# Altium PCB LKAS-EPS_PCB_V2I5.PcbDoc (part 1 of 2)
Units mm, origin at the board's own origin, x right, y up, seen from the top; angles counter-clockwise.
Board outline 49.4 x 33.91 mm, 4 copper layers (Top Layer, Layer 1, Layer 2, Bottom Layer), stack 0.602 mm thick; 54 components, 68 nets, 241 pads, 110 vias.
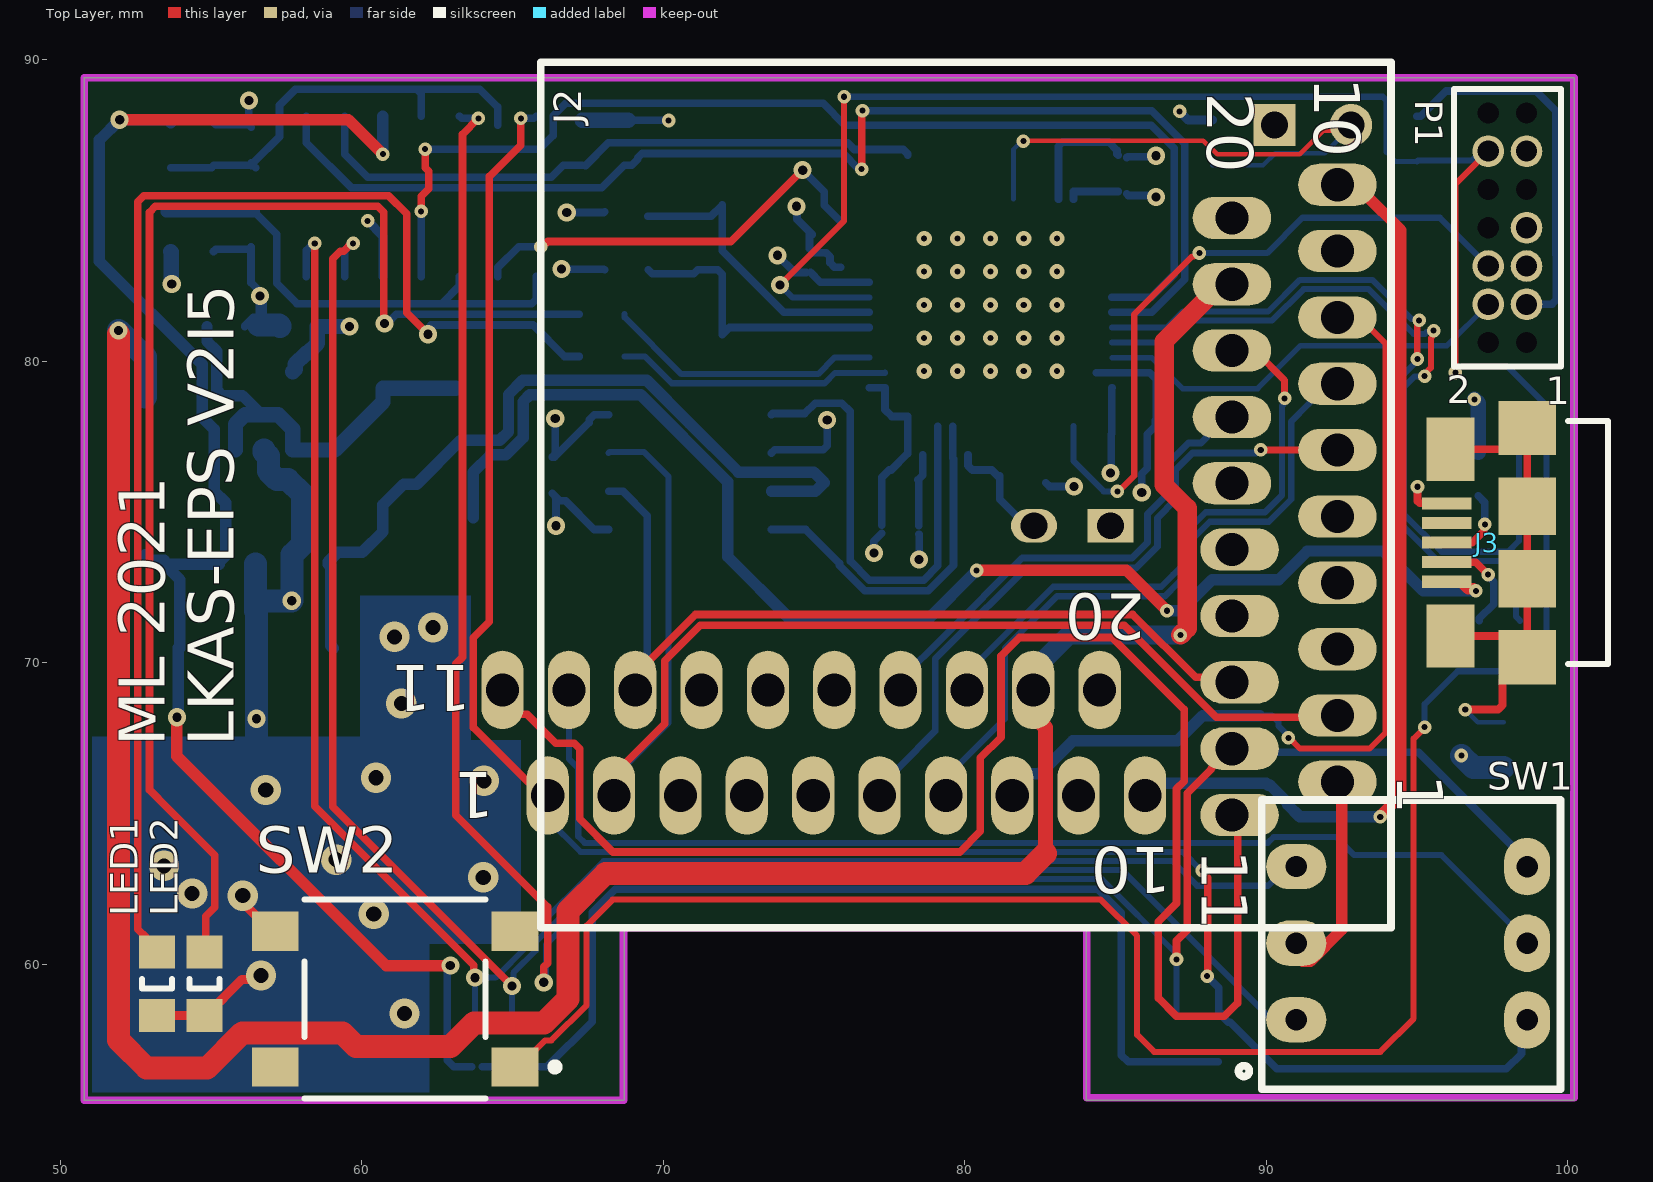
[diagram p0: Top Layer view]
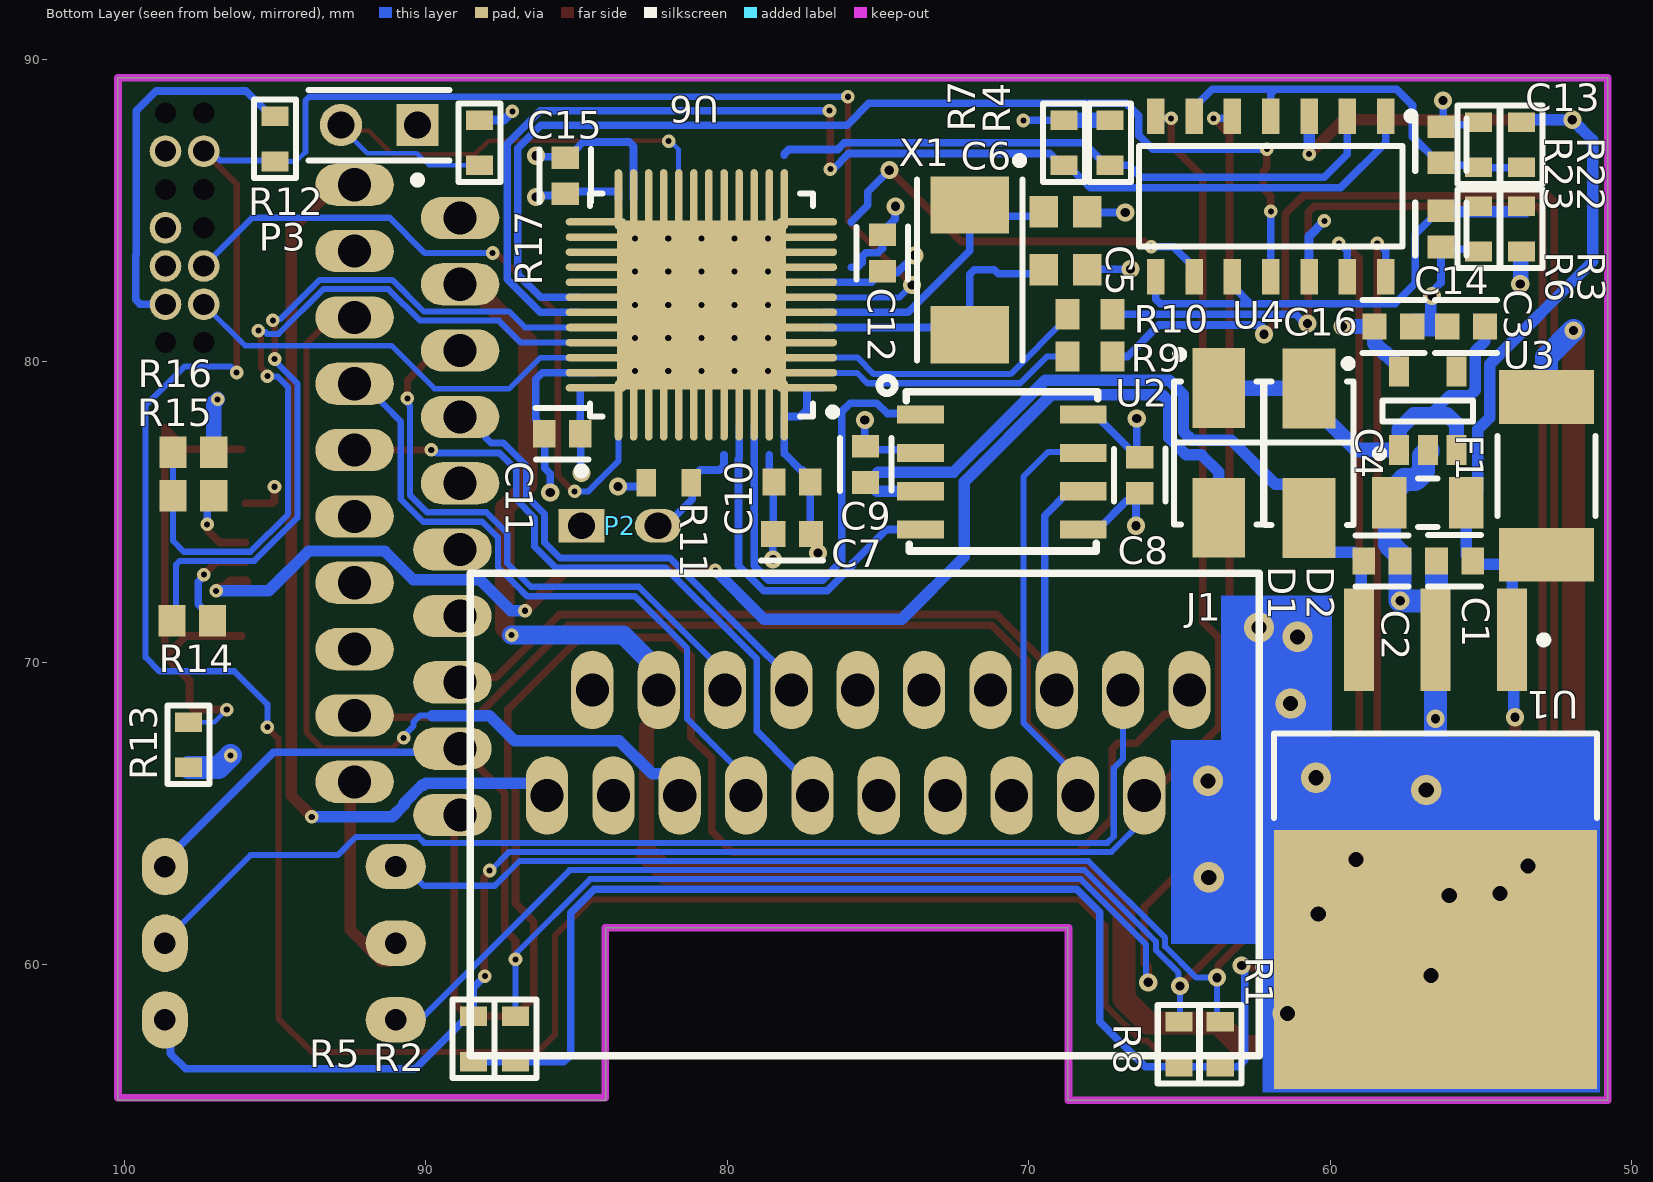
[diagram p1: Bottom Layer view, seen from below]
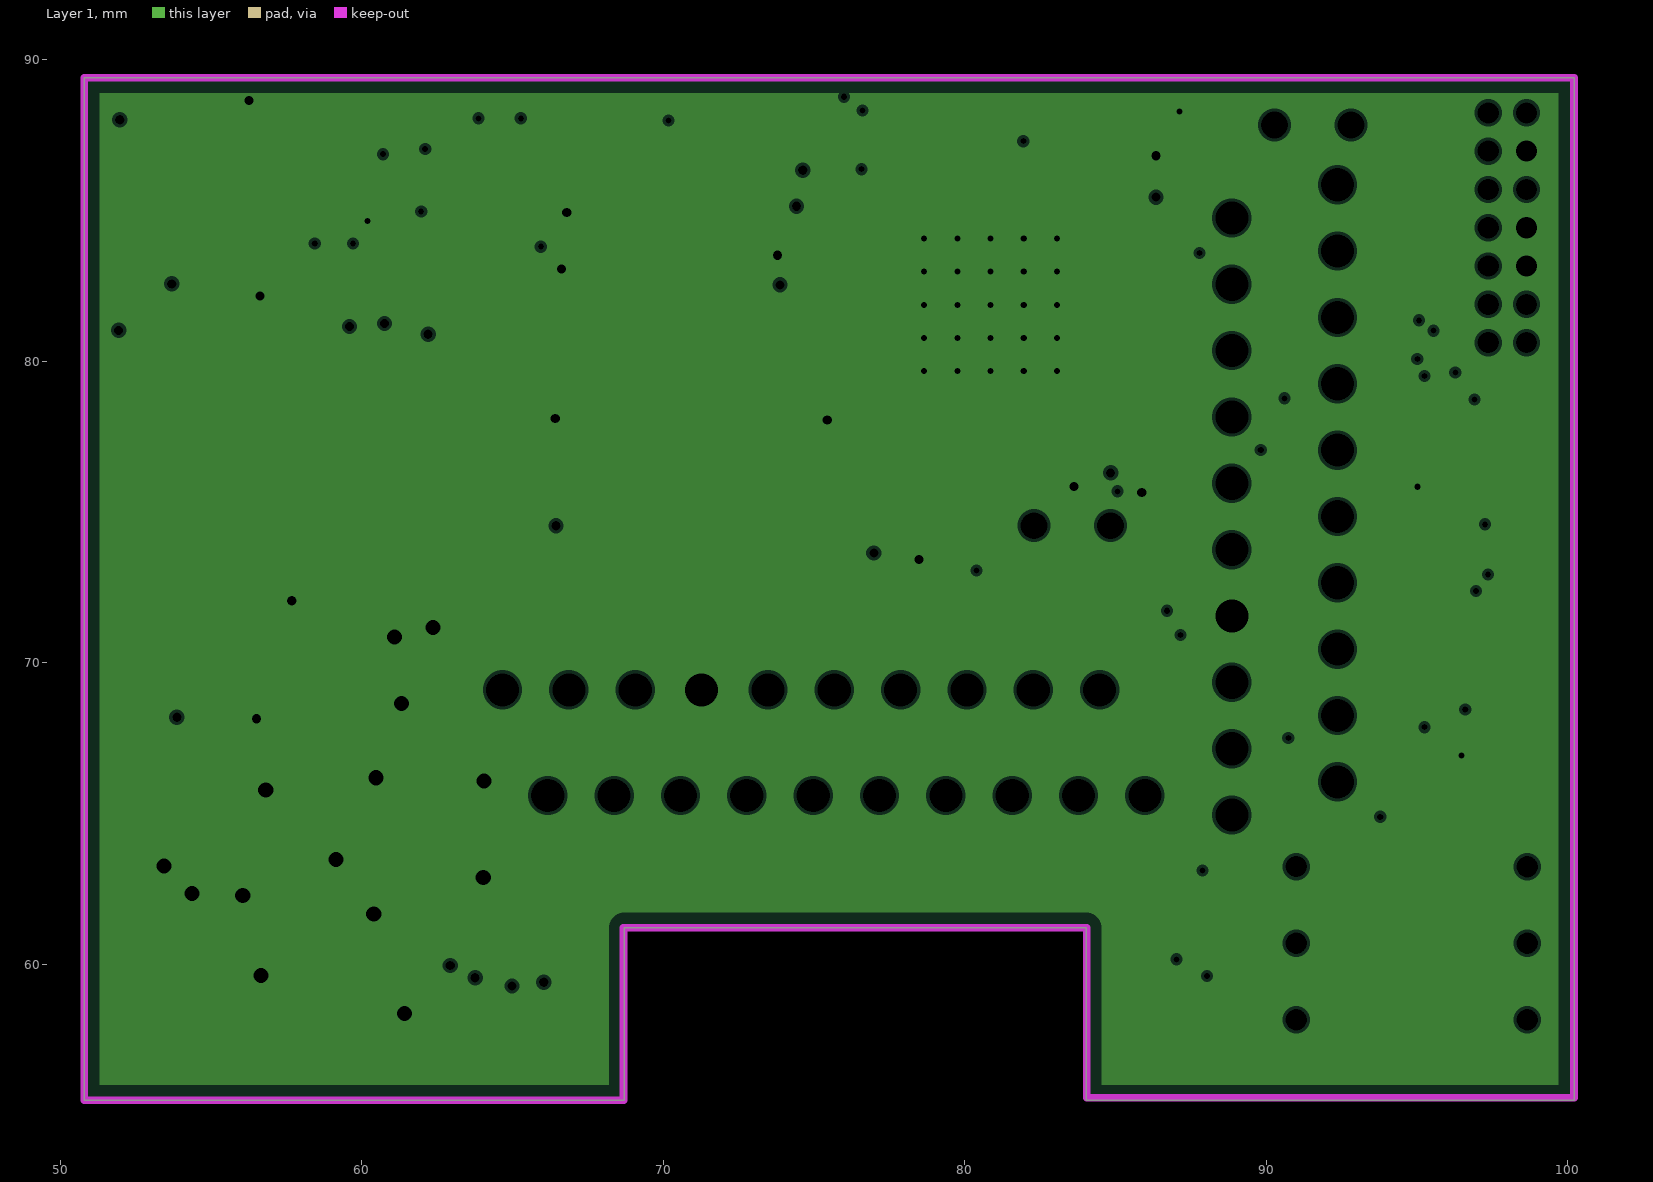
[diagram p2: Layer 1, clearances drawn from the general rule]
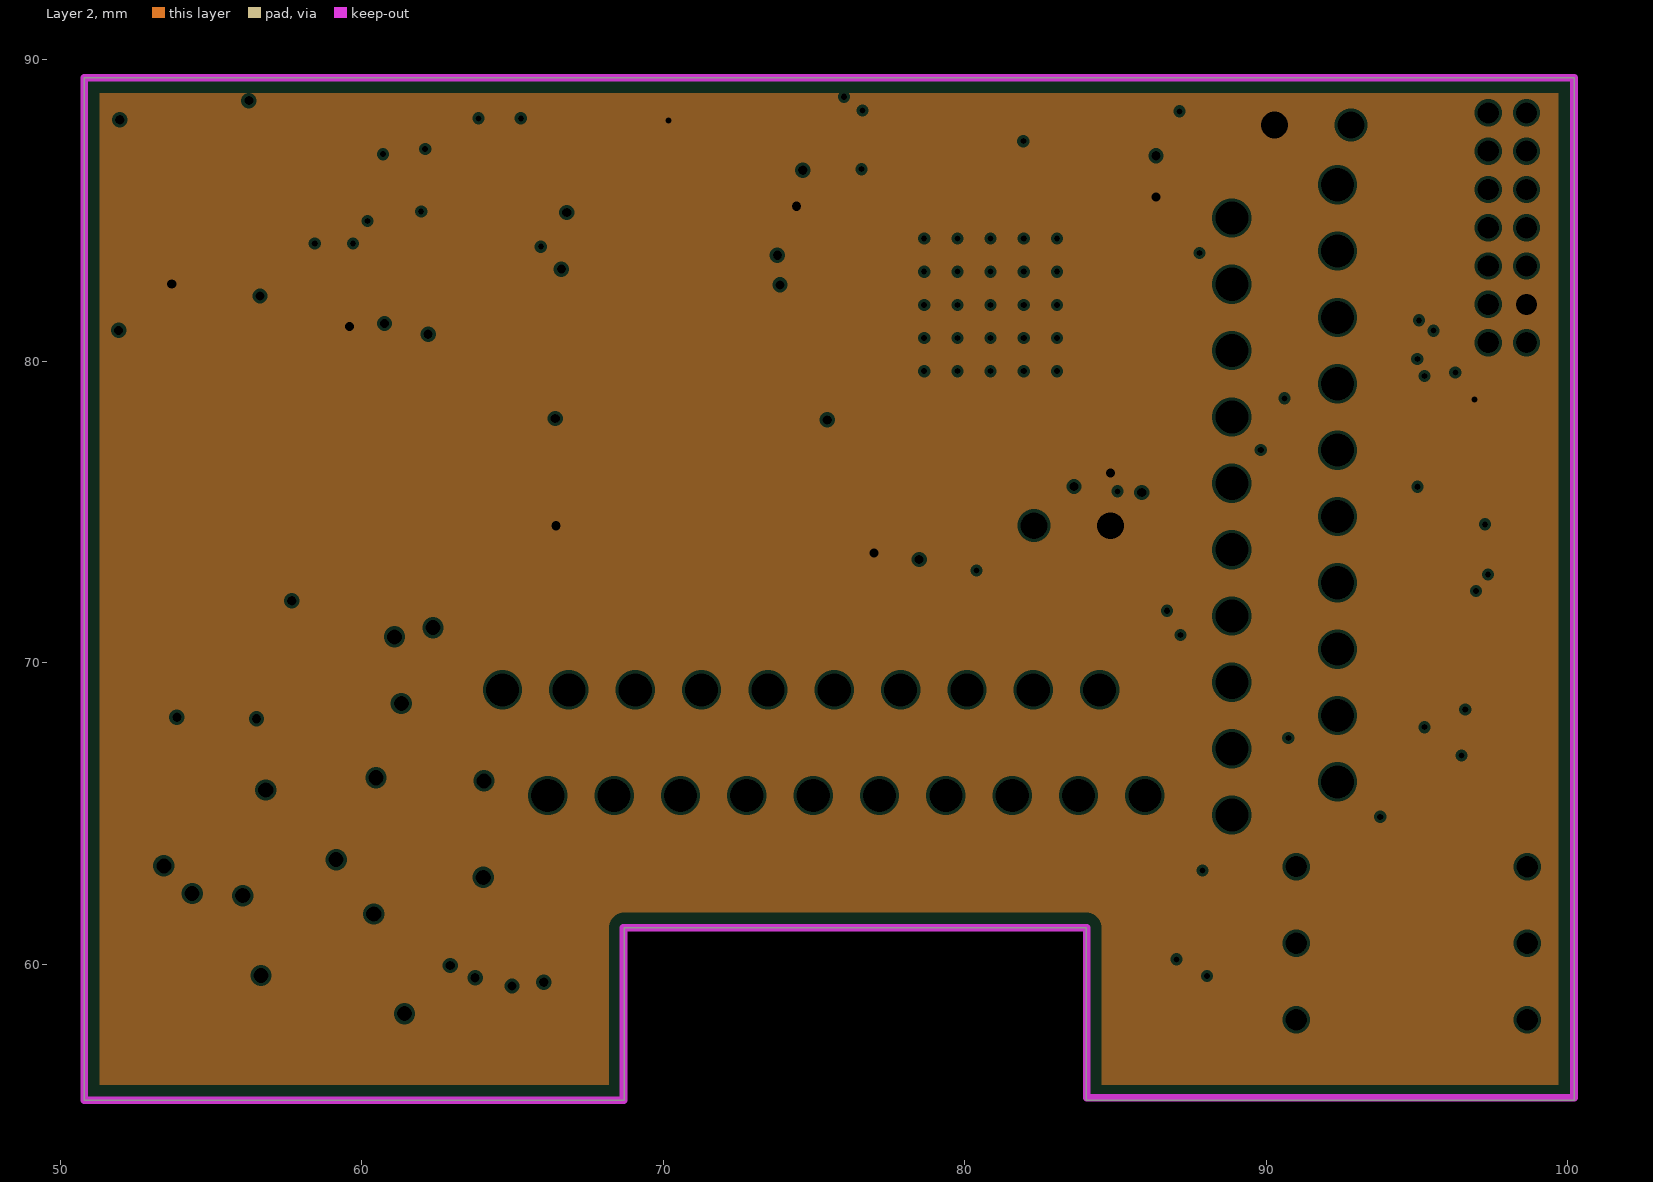
[diagram p3: Layer 2, clearances drawn from the general rule]
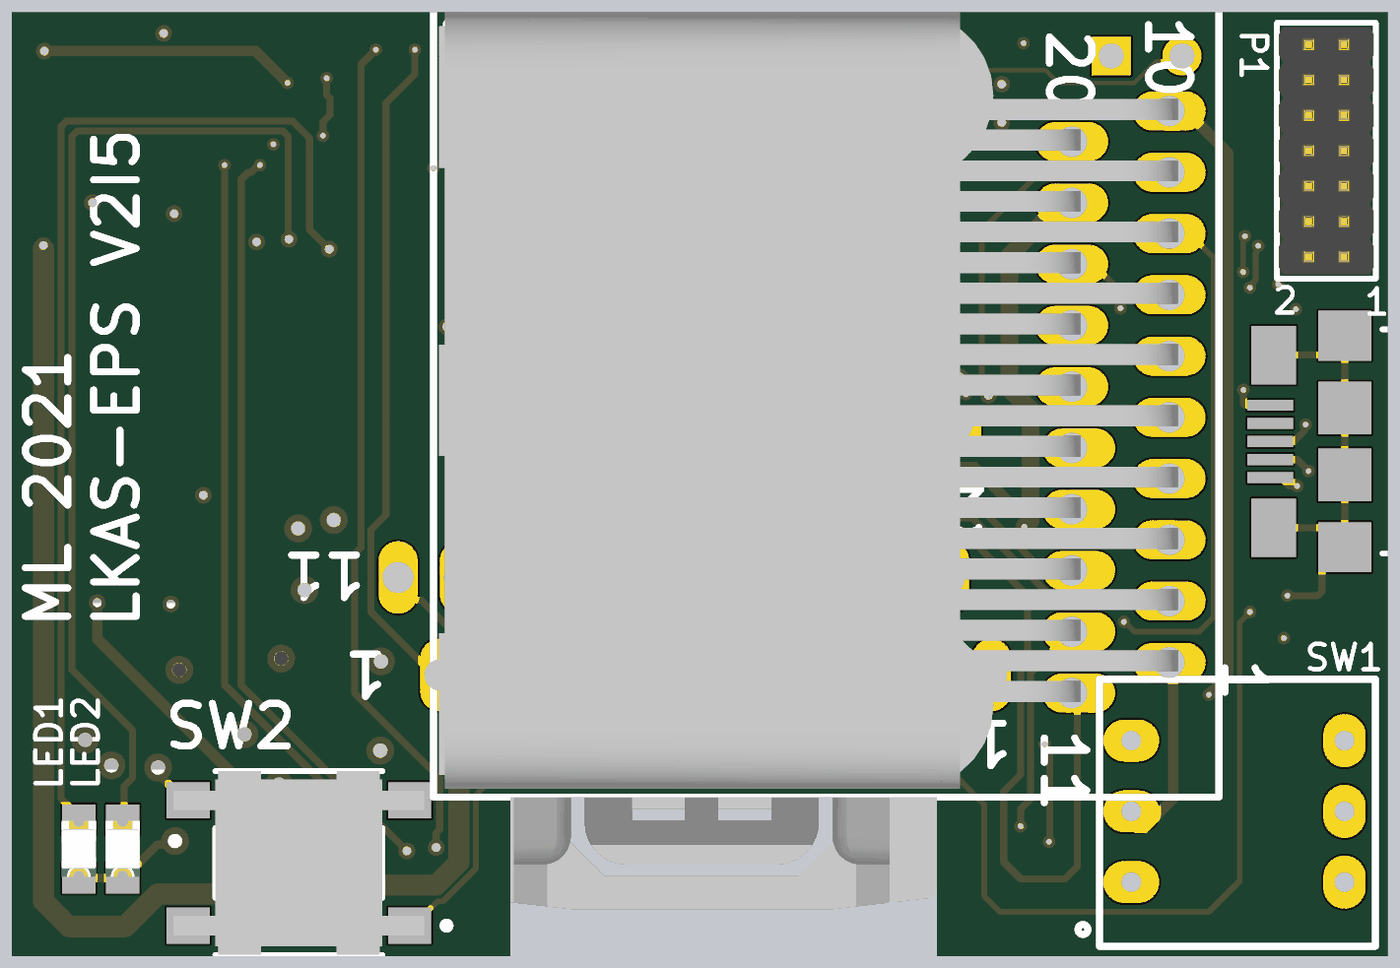
[diagram p4: 3D render of the assembled board from above, using the file's embedded part models]
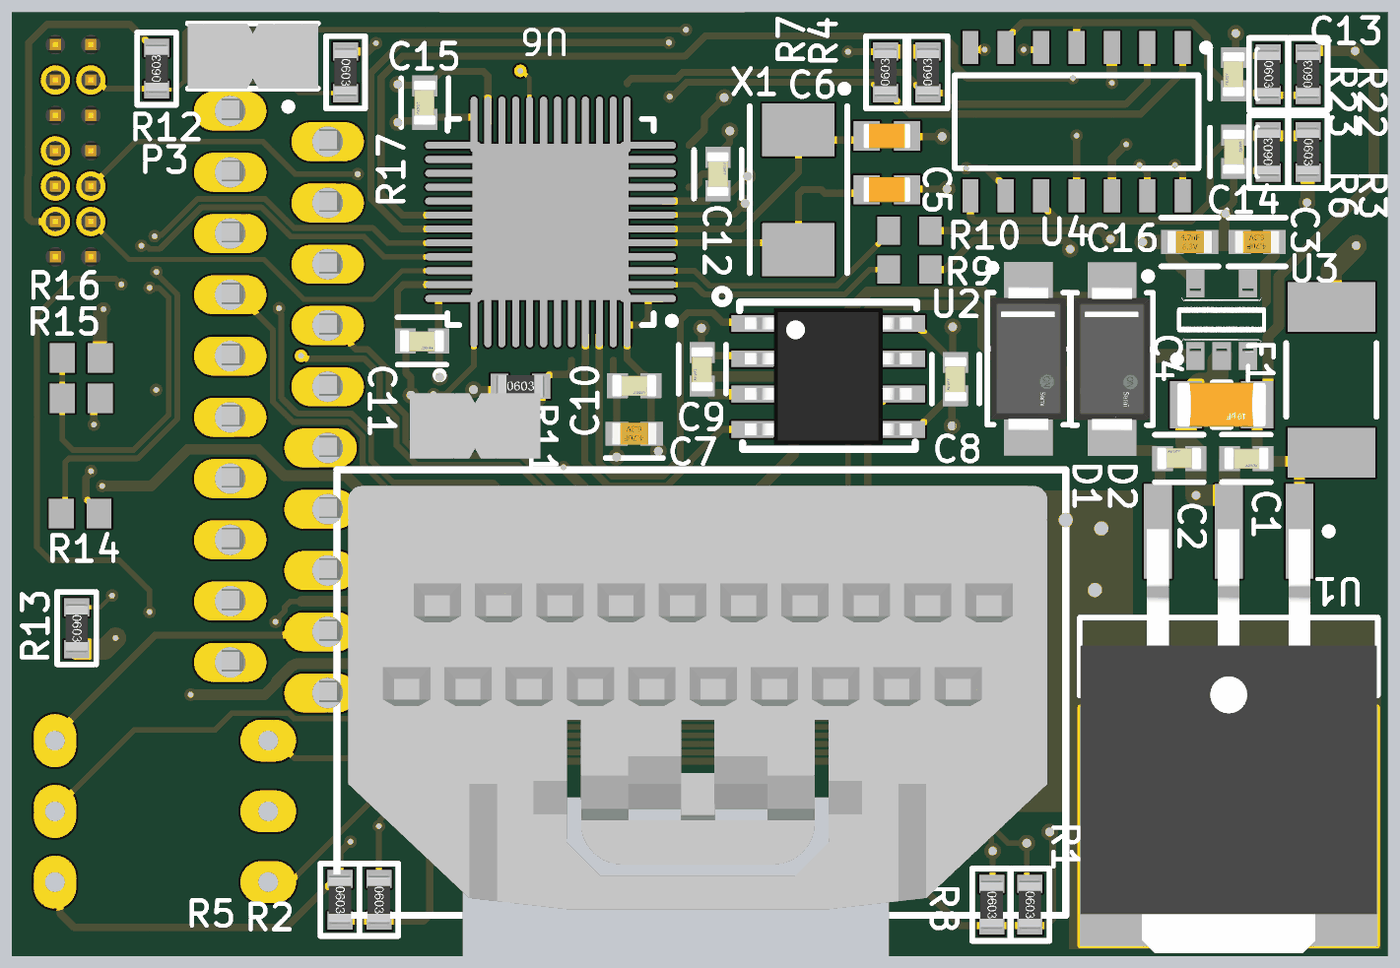
[diagram p5: 3D render of the assembled board from below, using the file's embedded part models]

## Layer stack, top to bottom
Top Solder: solder mask 0.0102, Solder Resist, Dk 3.5
Top Layer: signal copper 0.035
Dielectric 1: prepreg 0.0711, PP-006, Dk 4.1
Layer 1: plane copper 0.035, net GND
Dielectric1: dielectric 0.32, FR-4, Dk 4.8
Layer 2: plane copper 0.035, net +3V3
Dielectric 2: prepreg 0.0711, PP-006, Dk 4.1
Bottom Layer: signal copper 0.035
Bottom Solder: solder mask 0.0102, Solder Resist, Dk 3.5

## Board outline
50.8,55.499 68.707,55.499 68.707,61.214 84.023,61.214 84.023,55.499 100.203,55.499 100.203,89.408 50.8,89.408

## Design rules (kind name [scope] priority, off if disabled: settings)
BoardOutlineClearance [All] p1: gap=0.2 ignorepadtopadclearanceinfootprint=FALSE
Clearance [All] p1: gap=0.102 ignorepadtopadclearanceinfootprint=FALSE except(0.127: Arc-Via Track-Via SMDPad-Via THPad-Via Via-Via Via-Fill Via-Poly Via-Region Via-Text; 0.25: Arc-Hole Track-Hole SMDPad-Hole THPad-Hole Via-Hole Fill-Hole Poly-Hole Region-Hole Text-Hole)
ComponentClearance [All] p1: gap=0.102 collisioncheckmode=3 verticalgap=0.102 showdistances=TRUE
DiffPairsRouting [All] p1: maxlimit=0.102 minlimit=0.102 mostfreqgap=0.102 toplayer_minwidth=0.102 toplayer_maxwidth=1816.048 toplayer_prefwidth=0.102 bottomlayer_minwidth=0.102 bottomlayer_maxwidth=1816.048 bottomlayer_prefwidth=0.102 maxuncoupledlength=12.7
Height [All] p1: minheight=0 maxheight=1816.048 prefheight=12.7
HoleSize [All] p1: absolutevalues=TRUE maxlimit=6.3 minlimit=0.2 maxpercent=80.000 minpercent=20.000
HoleToHoleClearance [All] p1: gap=0.25 allowstackedmicrovias=FALSE
MatchedLengths "Schematic Matched Net Lengths" [InNet('USB_N')] p1: tolerance=3.81 checknetsindiffpair=FALSE checkdiffpairvsdiffpair=TRUE checkxsignals=TRUE checkothers=TRUE
MinimumAnnularRing [All] p1: minimumring=0.076
MinimumSolderMaskSliver [All] p1: minsoldermaskwidth=0
PlaneClearance [All] p1: clearance=0.102
PlaneConnect PlaneConnectPowerPads [InPadClass('PowerPads')] p1: planeconnectstyle=Direct reliefexpansion=0.508 reliefentries=4 reliefconductorwidth=0.254 reliefairgap=0.254
PlaneConnect [All] p2: pad.planeconnectstyle=Relief pad.reliefexpansion=0.3 pad.reliefentries=4 pad.reliefconductorwidth=0.102 pad.reliefairgap=0.102 via.planeconnectstyle=Direct via.reliefexpansion=0.3 via.reliefentries=4 via.reliefconductorwidth=0.127 via.reliefairgap=0.127
PolygonConnect PolygonConnectPowerPads [All vs (InPadClass('PowerPads'))] p1: connectstyle=Direct reliefconductorwidth=0.254 reliefentries=4 polygonreliefangle="90 Angle" airgapwidth=0.254
PolygonConnect [All] p2: thpad.connectstyle=Relief thpad.reliefconductorwidth=0.102 thpad.reliefentries=4 thpad.polygonreliefangle="90 Angle" thpad.airgapwidth=0.102 smdpad.connectstyle=Relief smdpad.reliefconductorwidth=0.102 smdpad.reliefentries=4 smdpad.polygonreliefangle="90 Angle" smdpad.airgapwidth=0.102 via.connectstyle=Direct via.reliefconductorwidth=0.127 via.reliefentries=4 via.polygonreliefangle="90 Angle" via.airgapwidth=0.127
RoutingVias [All] p1: holewidth=0.2 width=0.45 viastyle="Through Hole" minholewidth=0.2 minwidth=0.45 maxholewidth=6.3 maxwidth=6.55
SilkToSilkClearance [All] p1: silktosilkclearance=0
SilkToSolderMaskClearance [IsPad] p1: minsilkscreentomaskgap=0.102 clearancetoexposedcopper=TRUE
SolderMaskExpansion [All] p1: expansion=0.075 istentingtop=FALSE
UnRoutedNet [All] p1: checkbadconnections=TRUE
Width [All] p1: maxlimit=1816.048 minlimit=0.102 preferedwidth=0.152 minimp=50.000000 maximp=50.000000 favimp=50.000000
19 further rules are at their usual default settings.

## Classes and differential pairs
differential pair USB_R: +USB_R_P -USB_R_N
differential pair USB: +USB_P -USB_N

## Components (designator, comment, footprint, x,y, rotation, side; value= is the part's Value field where it differs from the comment)
C1 "C0603C104M3RACTU" FP-C0603C-CF-MFG 55.88,73.381 r0 bottom value="0.10 μF"
C2 "C0603C104M3RACTU" FP-C0603C-CF-MFG 58.293,73.381 r180 bottom value="0.10 μF"
C3 "CL10B475KQ8NQNC" FP-CL10-IPC_C 55.499,81.153 r0 bottom value=4.7uF
C4 "CL31A106KBHNNNE" FP-CL31-IPC_C 56.769,75.311 r0 bottom value=10uF
C5 "GRM1885C1H220JA01D" CAPC1608X90X35ML10T15 68.783,83.033 r180 bottom
C6 "GRM1885C1H220JA01D" CAPC1608X90X35ML10T15 68.783,84.963 r180 bottom
C7 "CL10B475KQ8NQNC" FP-CL10-IPC_C 77.851,74.27 r0 bottom value=4.7uF
C8 "C0603C104M3RACTU" FP-C0603C-CF-MFG 66.319,76.225 r90 bottom value="0.10 μF"
C9 "C0603C104M3RACTU" FP-C0603C-CF-MFG 75.413,76.581 r90 bottom value="0.10 μF"
C10 "C0603C104M3RACTU" FP-C0603C-CF-MFG 77.851,75.997 r0 bottom value="0.10 μF"
C11 "C0603C104M3RACTU" FP-C0603C-CF-MFG 85.471,77.597 r0 bottom value="0.10 μF"
C12 "C0603C104M3RACTU" FP-C0603C-CF-MFG 74.854,83.591 r270 bottom value="0.10 μF"
C13 "C0603C104M3RACTU" FP-C0603C-CF-MFG 56.336,87.18 r90 bottom value="0.10 μF"
C14 "C0603C104M3RACTU" FP-C0603C-CF-MFG 56.333,84.392 r270 bottom value="0.10 μF"
C15 "C0603C104M3RACTU" FP-C0603C-CF-MFG 85.369,86.157 r90 bottom value="0.10 μF"
C16 "CL10B475KQ8NQNC" FP-CL10-IPC_C 57.912,81.153 r180 bottom value=4.7uF
D1 "SS14" FP-403AE-MFG 63.703,76.962 r90 bottom
D2 "SS14" FP-403AE-MFG 60.706,76.953 r90 bottom
F1 "1812L050/30PR" LFUS-1812L05030PR_V 52.832,76.2 r270 bottom
J1 "MX34020SF1" MX34020SF1 85.731,70.939 r180 bottom locked
J2 "MX34020NF1" MX34020NF1 92.358,85.856 r270 top locked
J3 "10118192-0001LF" FCI-10118192-0001LF-5_V 98.654,73.99 r90 top
LED1 "150080SS75000" 0805_A 53.213,59.36 r90 top
LED2 "150080BS75000" 0805_A 54.788,59.36 r90 top
P1 "62201421121" 62201421121 97.993,84.43 r90 top
P2 "5-146280-2" TECO-5-146280-2_V#1 83.566,74.549 r180 bottom
P3 "5-146280-2" TECO-5-146280-2_V#2 91.542,87.833 r0 bottom
R1 "4K7" R0603 63.652,57.353 r270 bottom
R2 "4K7" R0603 87.02,57.531 r270 bottom
R3 "4K7" R0603 53.667,84.392 r270 bottom
R4 "4K7" R0603 67.31,87.249 r90 bottom
R5 "4K7" R0603 88.417,57.531 r270 bottom
R6 "4K7" R0603 55.089,84.392 r90 bottom
R7 "4K7" R0603 68.834,87.249 r90 bottom
R8 "4K7" R0603 65.024,57.353 r270 bottom
R9 "RC0603FR-07560RL" RESC1608X55X25ML10T15 67.97,80.162 r180 bottom
R10 "RC0603FR-07560RL" RESC1608X55X25ML10T15 67.97,81.559 r180 bottom
R11 "4K7" R0603 81.94,75.971 r180 bottom
R12 "4K7" R0603 94.996,87.376 r90 bottom
R13 "4K7" R0603 97.866,67.285 r270 bottom
R14 "CRCW060322R0JNTA" RESC1609X50X30ML10T20 97.739,71.399 r180 bottom value=22R
R15 "CRCW060322R0JNTA" RESC1609X50X30ML10T20 97.703,75.54 r180 bottom value=22R
R16 "CRCW06031K50FKTA" RESC1609X50X30ML10T20 97.703,76.987 r180 bottom
R17 "4K7" R0603 88.214,87.249 r270 bottom
R22 "4K7" R0603 53.667,87.18 r90 bottom
R23 "4K7" R0603 55.089,87.18 r270 bottom
SW1 "76STC02T" 76STC02T 94.818,60.706 r90 top
SW2 "B3S-1000" OMRON-B3S-1000-4_V 61.112,58.852 r180 top
U1 "UA7805CKTTR" KTT0003A_V 56.515,64.164 r270 bottom
U2 "MCP2562FD-E/SN" MCP2561 70.891,76.327 r180 bottom
U3 "MIC5504-3.3YM5-TR" FP-SOT23-5LD-PL-1-MFG 56.769,78.359 r90 bottom
U4 "LM339DR2G" ONSC-SOIC-14-751A-03_V 61.976,85.471 r270 bottom
U6 "STM32F103C6U6A" STM-UFQFPN48_M 80.856,81.872 r0 bottom
X1 "ABM7-8.000MHZ-D2Y-T" ABRA-ABM7-2_V 71.958,83.033 r270 bottom

## Footprints (in the part's own frame and the unit in brackets; to place one, negate y for a bottom-side part, rotate by r counter-clockwise, add the part's x,y. Pads: shape width x height; smd on the part's side, far side on the other; paste and mask are expansions set on the pad)
76STC02T [mm] "Switch Rocker Arm"
  oval 1.5x2 hole 0.71: 1A(-2.538,3.827) 2A(2.542,3.827) C1(0.002,3.827)
  oval 1.905x1.524 hole 0.71: 1B(-2.542,-3.827) 2B(2.538,-3.827) C2(-0.002,-3.827)
  silkscreen extent -4.85,-4.93 4.75,5.74
0805_A [mm] "Chip LED, 2-Leads, Body 2.0x1.3mm, IPC Medium Density"
  rect 1.1x1.2 smd: 1(-1.05,0) 2(1.05,0)
  silkscreen extent -0.15,-0.5 0.15,0.5, body extent -1,-0.63 1,0.62, height 0.68
62201421121 [mm] "Pin Header, pitch 1.27 mm, THT, Vertical, dual row, 14p"
  round 0 hole 0.7 unplated: 1(-3.81,-0.635) 2(-3.81,0.635) 8(0,0.635) 9(1.27,-0.635) 10(1.27,0.635) 13(3.81,-0.635) 14(3.81,0.635)
  round 1.05 hole 0.7: 3(-2.54,-0.635) 4(-2.54,0.635) 5(-1.27,-0.635) 6(-1.27,0.635) 7(0,-0.635) 11(2.54,-0.635) 12(2.54,0.635)
  silkscreen extent -4.59,-1.78 4.59,1.78, body extent -4.44,-1.7 4.45,1.7, height 5.33
ABRA-ABM7-2_V [mm] "SMD, 2-Leads, Body 6x3.5mm"
  rect 1.9x2.6 smd: 1(-2.15,0) 2(2.15,0)
  silkscreen extent -3.75,-1.75 3,1.78, body extent -3,-1.75 3,1.75, height 1.4
CAPC1608X90X35ML10T15 [mm] "Chip Capacitor, 2-Leads, Body 1.7x0.9mm, IPC Low Density"
  rect 0.95x1.05 smd: 1(-0.725,0) 2(0.725,0)
  body extent -0.85,-0.45 0.85,0.45, height 0.9
FCI-10118192-0001LF-5_V [mm] "SMD, 5-Leads, Body 8.05x5.77mm, Pitch 0.65mm"
  rect 0.4x1.65 smd: 1(-1.3,2.675) 2(-0.65,2.675) 3(0,2.675) 4(0.65,2.675) 5(1.3,2.675)
  rect 2.1x1.6 smd: 6(-3.1,2.55) 7(3.1,2.55)
  rect 1.8x1.9 smd: 8(-3.8,0) 9(3.8,0)
  rect 1.9x1.9 smd: 10(-1.2,0) 11(1.2,0)
  silkscreen extent -4.03,-2.67 4.03,-1.35, body extent -4.03,-2.67 4.03,3.1, height 2.7
FP-403AE-MFG [mm]
  rect 2.65x1.75 smd paste+0 mask+0: 1(-2.15,0) 2(2.15,0)
  silkscreen extent -2.37,-1.48 3.39,1.48, body extent -2.6,-1.36 2.6,1.36, height 2.5
FP-C0603C-CF-MFG [mm]
  rect 0.75x0.9 smd paste+0 mask+0: 1(-0.6,0) 2(0.6,0)
  silkscreen extent -0.87,-0.85 0.88,0.85, body extent -0.8,-0.4 0.8,0.4, height 0.87
FP-CL10-IPC_C [mm]
  rect 0.806x0.858 smd paste+0 mask+0: 1(-0.626,0) 2(0.626,0)
  silkscreen extent -1.03,-0.87 1.03,0.87, body extent -0.8,-0.4 0.8,0.4, height 0.95
FP-CL31-IPC_C [mm]
  rect 1.154x1.706 smd: 1(-1.276,0) 2(1.276,0)
  silkscreen extent -0.32,-0.8 0.32,0.8, body extent -1.6,-0.8 1.6,0.8, height 1.8
FP-SOT23-5LD-PL-1-MFG [mm]
  rect 1x0.66 smd paste+0 mask+0: 1(-1.3,0.95) 2(-1.3,0) 3(-1.3,-0.95) 4(1.3,-0.95) 5(1.3,0.95)
  silkscreen extent -1.54,-1.5 0.35,1.73, body extent -1.4,-1.45 1.4,1.45, height 1.45
KTT0003A_V [mm] "DPAK, 3-Leads, Body 10.65x9.65mm, Pitch 2.54mm"
  rect 3.4x1 smd: 1(-6.6,2.54) 2(-6.6,0) 3(-6.6,-2.54)
  rect 8.6x10.7 smd: 4(4,0)
  silkscreen extent -6.72,-5.35 -0.7,5.35, body extent -6.68,-5.32 8.56,5.32, height 4.83
LFUS-1812L05030PR_V [mm] "SMD, 2-Leads, Body 4.55x3.24mm"
  rect 1.78x3.15 smd: 1(-2.615,0) 2(2.615,0)
  silkscreen extent -1.33,-1.62 1.33,1.62, body extent -2.27,-1.62 2.27,1.62, height 1
MCP2561 [mm] "SOIC 8 SN type"
  rect 1.55x0.6 smd: 1(-2.7,1.905) 2(-2.7,0.635) 3(-2.7,-0.635) 4(-2.7,-1.905) 5(2.7,-1.905) 6(2.7,-0.635) 7(2.7,0.635) 8(2.7,1.905)
  silkscreen extent -4.06,-2.62 3.18,3.12, body extent -3,-2.45 3,2.45, height 1.75
MX34020NF1 [mm] "Receptical with male pins"
  oval 1.4x2.6 hole 1.1: 1(19.8,0) 2(17.6,0) 3(15.4,0) 4(13.2,0) 5(11,0) 6(8.8,0) 7(6.6,0) 8(4.4,0) 9(2.2,0) 10(0,0) 16(9.9,-3.5) 17(7.7,-3.5) 18(5.5,-3.5) 19(3.3,-3.5) 20(1.1,-3.5)
  oval 1.4x2.6 hole 1.1 copper offset 0,0.254: 11(20.9,-3.5) 12(18.7,-3.5) 13(16.5,-3.5) 14(14.3,-3.5) 15(12.1,-3.5)
  silkscreen extent -4.06,-26.42 24.64,1.78, body extent -3.56,-26.21 24.34,0.31, height 16
MX34020SF1 [mm] "Plug without pins"
  oval 1.4x2.6 hole 1.1: 1(19.558,-5.334) 2(17.358,-5.334) 3(15.158,-5.334) 4(12.958,-5.334) 5(10.758,-5.334) 6(8.558,-5.334) 7(6.358,-5.334) 8(4.158,-5.334) 9(1.958,-5.334) 10(-0.242,-5.334) 11(21.058,-1.834) 12(18.858,-1.834) 13(16.658,-1.834) 14(14.458,-1.834) 15(12.258,-1.834) 16(10.058,-1.834) 17(7.858,-1.834) 18(5.658,-1.834) 19(3.458,-1.834) 20(1.258,-1.834)
  silkscreen extent -2.79,-13.97 23.37,2.03, body extent -2.39,-13.75 22.71,1.45, height 21
OMRON-B3S-1000-4_V [mm] "SMD, 4-Leads, Body 6.6x6mm"
  rect 1.55x1.3 smd: 1(-3.975,2.25) 2(3.975,2.25) 3(-3.975,-2.25) 4(3.975,-2.25)
  silkscreen extent -5.42,-3.3 3,3.3, body extent -4.5,-3.3 4.5,3.3, height 4.4
ONSC-SOIC-14-751A-03_V [mm] "SOIC, 14-Leads, Body 8.75x4mm, Pitch 1.27mm"
  rect 1.18x0.58 smd: 1(-2.66,3.81) 2(-2.66,2.54) 3(-2.66,1.27) 4(-2.66,0) 5(-2.66,-1.27) 6(-2.66,-2.54) 7(-2.66,-3.81) 8(2.66,-3.81) 9(2.66,-2.54) 10(2.66,-1.27) 11(2.66,0) 12(2.66,1.27) 13(2.66,2.54) 14(2.66,3.81)
  silkscreen extent -2.78,-4.37 1.67,4.77, body extent -2,-4.38 2,4.38, height 1.75
R0603 [mm]
  rect 0.65x0.9 smd: 1(-0.75,0) 2(0.75,0)
  silkscreen extent -1.3,-0.7 1.3,0.7, body extent -1.05,-0.4 1.05,0.4, height 0.5
RESC1608X55X25ML10T15 [mm] "Chip Resistor, 2-Leads, Body 1.70x0.90mm, IPC Low Density"
  rect 0.8x1 smd: 1(-0.75,0) 2(0.75,0)
  body extent -0.85,-0.45 0.85,0.45, height 0.55
RESC1609X50X30ML10T20 [mm] "Chip Resistor, 2-Leads, Body 1.55x0.85mm, IPC Low Density"
  rect 0.9x1.05 smd: 1(-0.675,0) 2(0.675,0)
  body extent -0.82,-0.48 0.82,0.48, height 0.5
STM-UFQFPN48_M [mm] "QFN, 48-Leads, Body 7.1x7.1mm, Pitch 0.5mm, Thermal Pad 5.6x5.6mm, IPC Low Density"
  oval 2x0.25 smd: 1(-3.5,2.75) 2(-3.5,2.25) 3(-3.5,1.75) 4(-3.5,1.25) 5(-3.5,0.75) 6(-3.5,0.25) 7(-3.5,-0.25) 8(-3.5,-0.75) 9(-3.5,-1.25) 10(-3.5,-1.75) 11(-3.5,-2.25) 12(-3.5,-2.75) 25(3.5,-2.75) 26(3.5,-2.25) 27(3.5,-1.75) 28(3.5,-1.25) 29(3.5,-0.75) 30(3.5,-0.25) 31(3.5,0.25) 32(3.5,0.75) 33(3.5,1.25) 34(3.5,1.75) 35(3.5,2.25) 36(3.5,2.75)
  oval 0.25x2 smd: 13(-2.75,-3.5) 14(-2.25,-3.5) 15(-1.75,-3.5) 16(-1.25,-3.5) 17(-0.75,-3.5) 18(-0.25,-3.5) 19(0.25,-3.5) 20(0.75,-3.5) 21(1.25,-3.5) 22(1.75,-3.5) 23(2.25,-3.5) 24(2.75,-3.5) 37(2.75,3.5) 38(2.25,3.5) 39(1.75,3.5) 40(1.25,3.5) 41(0.75,3.5) 42(0.25,3.5) 43(-0.25,3.5) 44(-0.75,3.5) 45(-1.25,3.5) 46(-1.75,3.5) 47(-2.25,3.5) 48(-2.75,3.5)
  rect 5.6x5.6 smd: 49(0,0)
  silkscreen extent -4.47,-3.7 3.7,3.7, body extent -3.55,-3.55 3.55,3.55, height 0.6
TECO-5-146280-2_V#1 [mil] "Connector, 2-Leads, Body 4.67x2.34mm, Pitch 2.54mm"
  rect 60x44 hole 35.04: 1(-50,0)
  oval 60x44 hole 35.04: 2(50,0)
  silkscreen extent -55,67 -45,77, body extent -92,-46 92,46, height 210
TECO-5-146280-2_V#2 [mil] "Connector, 2-Leads, Body 4.67x2.34mm, Pitch 2.54mm"
  rect 55.12x55.12 hole 35.04: 1(-50,0)
  round 55.12 hole 35.04: 2(50,0)
  silkscreen extent -92,-46 92,77, body extent -92,-46 92,46, height 210

## Part data
C1 C2 C8 C9 C10 C11 C12 C13 C14 C15: library part CMP-2006-03065-2, "CAP CER 0.1UF 25V X7R 0603", Capacitance="0.1 μF", Manufacturer=KEMET, Package=C0603C-CF, Temperature="-55°C to +125°C", Temperature Characteristic=X7R, Temperature Coefficient=30ppm/°C, Temperature Range High=+125°C, Temperature Range Low=-55°C, Tolerance=0.2, Voltage Rating="25 V", Automotive=Yes, Automotive Grade="Grade 1", Category=Cap, ComponentLink2Description=Datasheet, ComponentLink2URL=https://api.kemet.com/component-edge/download/datasheet/C0603C100J5GACAUTO.pdf, Device Class L1="Passive Components", Device Class L2=Capacitors, Device Class L3="Ceramic Capacitors", Digikey Description="CAP CER 0.1UF 25V X7R 0603", Height=0.87mm, Lead Free=Yes, Manufacturer Part Number=C0603C104M3RACTU, Material=Ceramic, Mouser Description="Multilayer Ceramic Capacitors MLCC - SMD/SMT 25volts 0.1uF X7R 20%", Octopart=https://octopart.com/c0603c104m3ractu-kemet-95914, RoHS=TRUE
C3 C7 C16: library part CMP-2000-06096-2, "CAP CER 4.7UF 6.3V X7R 0603", Capacitance=4.7uF, Manufacturer=Samsung, Package=CL10, Temperature="-55°C to +125°C", Temperature Characteristic=X7R, Temperature Coefficient=15%, Temperature Range High=+125°C, Temperature Range Low=-55°C, Tolerance=10%, Voltage Rating=6.3V, Automotive=No, Category=Cap, ComponentLink2Description=Datasheet, ComponentLink2URL=http://www.samsungsem.com/kr/support/product-search/mlcc/__icsFiles/afieldfile/2018/07/24/CL10B475KQ8NQNC.pdf, Device Class L1="Passive Components", Device Class L2=Capacitors, Device Class L3="Ceramic Capacitors", Digikey Description="CAP CER 4.7UF 6.3V X7R 0603", Height=0.95mm, Ipc Land Pattern Name=CAPC16080X80, Lead Free=Yes, Manufacturer Part Number=CL10B475KQ8NQNC, Material=Ceramic, Mouser Description="C Series 0402 4.7 uF 6.3 V ±20 % Tolerance X5R SMT Multilayer Ceramic Capacitor", Octopart=https://octopart.com/cl10b475kq8nqnc-samsung-24957976, RoHS=TRUE
C4: library part CMP-13271-000016-1, "CAP CER 10UF 50V X5R 1206", Capacitance=10uF, Manufacturer=Samsung, Package=CL31, Temperature="-55°C to +85°C", Temperature Characteristic=X5R, Temperature Coefficient=15%, Temperature Range High=+85°C, Temperature Range Low=-55°C, Tolerance=10%, Voltage=50V, Automotive=No, Category=Cap, ComponentLink2Description=Datasheet, ComponentLink2URL=http://www.samsungsem.com/kr/support/product-search/mlcc/__icsFiles/afieldfile/2018/06/21/CL31A106KBHNNNE.pdf, Device Class L1="Passive Components", Device Class L2=Capacitors, Device Class L3="Ceramic Capacitors", Digikey Description="CAP CER 10UF 50V X5R 1206", Height=1.8mm, Ipc Land Pattern Name=CAPC320160X160, Lead Free=Yes, Manufacturer Part Number=CL31A106KBHNNNE, Material=Ceramic, Octopart=https://octopart.com/cl31a106kbhnnne-samsung-19832778, RoHS=TRUE, Voltage Rating=50V
C5 C6: library part CMP-2000-04945-1, "Chip Capacitor, 22 pF, +/- 5%, 50 V, -55 to 125 degC, 0603 (1608 Metric), RoHS, Tape and Reel", Capacitance=22pF, Case Size/Dimension=0603, Dielectric=C0G, Manufacturer=Murata, Package Description="2-Pin Surface Mount Device, Body 1.6 x 0.8 mm", Package Reference=603, Rated Voltage=50V, Tolerance (%)=±5%, Datasheet URL=https://datasheet.ciiva.com/11786/0900766b807a1cab-11786398.pdf, Datasheet Version=Jul-06, Manufacturer URL=http://www.murata.com/
D1 D2: library part CMP-2000-04943-2, "DIODE SCHOTTKY 40V 1A SMA", Forward Current=1A, Manufacturer="ON Semiconductor", Max Junction Temp=+125°C, Max Repetitive Reverse Voltage=40V, Max Surge Forward Current=40A, Package=403AE, Peak Reverse Current=0.2mA, Temperature="-65°C to +125°C", Temperature Range Low=-65°C, Automotive=No, Category=Diode, ComponentLink2Description=Datasheet, ComponentLink2URL=https://www.onsemi.com/pub/Collateral/SS19-D.PDF, Device Class L1="Discrete Semiconductors", Device Class L2=Diodes, Device Class L3="Schottky Diodes", Digikey Description="DIODE SCHOTTKY 40V 1A SMA", Height=2.5mm, Lead Free=Yes, Manufacturer Part Number=SS14, Mouser Description="Schottky Diodes & Rectifiers SMA 40V 1.0A", Octopart=https://octopart.com/ss14-on+semiconductor-29205033, RoHS=TRUE, Standoff Height=0.05mm, Temperature Range High=+125°C
F1: library part CMP-2000-05508-1, "PTC Resettable Fuse, 0.8 W, 30 V, -40 to 85 degC, 2-Pin SMD, RoHS, Tape and Reel", Current - Hold (Ih) (Max)=500mA, Current - Max=100A, Current - Trip (It)=1A, Manufacturer=Littelfuse-Inc., Package / Case=1812(4532Metric),Concave, Package Description="2-Pin Surface Mount Device, Body 4.55 x 3.24 mm", Package Reference=1812, Voltage - Max=30V, Category=CircuitProtection, Datasheet URL=http://www.littelfuse.com/~/media/electronics/datasheets/resettable_ptcs/littelfuse_ptc_1812l_datasheet.pdf.pdf, Datasheet Version=02/2016, Family=PTCResettableFuses, Manufacturer URL=http://www.littelfuse.com/, Mounting Technology=SurfaceMount, Packaging=Tape&Reel(TR), R Min/Max=0.150~1.000Ohm, Series=POLY-FUSE®,1812L, Time to Trip=0.15s
J1: "Automotive Connectors Sckt HOUSING 20P", Color=Grey, Current Rating=3A, Manufacturer="JAE Electronics", Max Operating Temperature=85°C, Min Operating Temperature=-40°C, Package Quantity=192, Supplier Part Number 1=670-2925-ND, Category=Connectors, ComponentLink1Description=https://datasheet.ciiva.com/11742/0900766b80fc15d5-11742077.pdf?src-supplier=RSComponents, ComponentLink1URL=https://datasheet.ciiva.com/11742/0900766b80fc15d5-11742077.pdf?src-supplier=RSComponents, ComponentLink2Description=https://datasheet.ciiva.com/4553/sj038752-64597-4553699.pdf?src-supplier=Mouser, ComponentLink2URL=https://datasheet.ciiva.com/4553/sj038752-64597-4553699.pdf?src-supplier=Mouser, ComponentLink3Description=https://datasheet.ciiva.com/6739/614004-6739335.pdf?src-supplier=Newark, ComponentLink3URL=https://datasheet.ciiva.com/6739/614004-6739335.pdf?src-supplier=Newark, ComponentLink4Description=https://datasheet.ciiva.com/762/transportation-pg-v2-2-762885.pdf?src-supplier=Digi-Key, ComponentLink4URL=https://datasheet.ciiva.com/762/transportation-pg-v2-2-762885.pdf?src-supplier=Digi-Key, ComponentLink5Description=https://datasheet.ciiva.com/5821/1009688-5821398.pdf?src-supplier=Farnell, ComponentLink5URL=https://datasheet.ciiva.com/5821/1009688-5821398.pdf?src-supplier=Farnell, ComponentLink6Description=https://datasheet.ciiva.com/7648/1009712-7648886.pdf?src-supplier=Element14, ComponentLink6URL=https://datasheet.ciiva.com/7648/1009712-7648886.pdf?src-supplier=Element14, Connector Type=Receptacle,Socket,Rectangular, Contact Material="Copper Alloy,Copper", Contact Plating=Tin, Depth=21.3mm, Gender=Female, Height=14mm, Housing Material=PPE, Manufacturer Part Number=MX34020SF1, Mount="Free Hanging,Cable", Number of Contacts=20, Number of Positions=20, Number of Rows=2, Packaging=Tray, Pitch=0.087inch, Pricing 1="1=0.73000, 10=0.63800, 25=0.60000, 50=0.57500, 100=0.55000, 250=0.50000, 576=0.45000, 1152=0.40000, 2880=0.36250 (USD)", RoHS=Yes, Row Spacing=0.118inch, Stock 1=3393, Supplier 1=Digi-Key, Termination=Crimp, Width=25.1mm
J2: "JAE MX34 Series, 2.2mm Pitch 20 Way 2 Row Right Angle PCB Header, Solder Termination, 3A", Color=Grey, Current Rating=3A, Manufacturer="JAE Electronics", Package Quantity=288, Supplier Part Number 1=670-2924-ND, Category=Connectors, ComponentLink1Description=https://datasheet.ciiva.com/7621/1009688-7621584.pdf?src-supplier=Element14, ComponentLink1URL=https://datasheet.ciiva.com/7621/1009688-7621584.pdf?src-supplier=Element14, ComponentLink2Description=https://datasheet.ciiva.com/4554/sj038751-3818-4554108.pdf?src-supplier=Mouser, ComponentLink2URL=https://datasheet.ciiva.com/4554/sj038751-3818-4554108.pdf?src-supplier=Mouser, ComponentLink3Description=https://datasheet.ciiva.com/11754/0900766b80ddc6f0-11754159.pdf?src-supplier=RSComponents, ComponentLink3URL=https://datasheet.ciiva.com/11754/0900766b80ddc6f0-11754159.pdf?src-supplier=RSComponents, ComponentLink4Description=https://datasheet.ciiva.com/732/transportation-pg-v2-2-732931.pdf?src-supplier=Digi-Key, ComponentLink4URL=https://datasheet.ciiva.com/732/transportation-pg-v2-2-732931.pdf?src-supplier=Digi-Key, Connector Type="Male Pin,Rectangular", Contact Material=Brass, Contact Mating Length=0.303inch, Contact Plating=Tin, Gender=Male, Manufacturer Part Number=MX34020NF1, Mount="Through Hole", Number of Contacts=20, Number of Positions=20, Number of Rows=2, Orientation="Right Angle", Packaging=Rail/Tube, Pitch=0.087inch, Pricing 1="1=1.57000, 10=1.42100, 100=1.21800, 500=1.01500, 1000=0.87000, 5000=0.77140, 10000=0.75400 (USD)", REACH SVHC="No SVHC", RoHS=Yes, Row Spacing=0.118inch, Stock 1=10297, Supplier 1=Digi-Key, Termination=Solder
J3: library part CMP-2000-05118-1, "Micro USB B Type Receptacle, -55 to 85 degC, 5-Pin SMD, RoHS, Tape and Reel", Color=Black, Current Rating=1.8A, Flammability Rating=UL94V-0, Insulation Resistance=1000MOhms, Manufacturer=FCI, Operating Temperature Range=-55Cto+85C, Brand=FCI, Connector Type=MicroUSBTypeBreceptacle, Contact Material=CopperAlloy, Contact Plating=Gold, Datasheet URL=http://www.mouser.com/ds/2/154/10118192-793027.pdf, Datasheet Version="Rev. B, 05/2015", Factory Pack Quantity=1400, Gender=Female, Manufacturer URL=http://www.fci.com/, Mounting Angle=Right, Number of Contacts=5Contact, Packaging=Reel, Product=MicroUSBTypeBConnectors, Product Category=USBConnectors, RoHS=Details, Standard=USB2.0, Termination Style=SMD/SMT
LED1: library part CMP-1426-00010-1, "SMD mono-color Chip LED, WL-SMCW, Super Red", Color="Super Red", Manufacturer="Wuerth Elektronik", ComponentLink1Description="Manufacturer URL", ComponentLink1URL=http://www.we-online.com, ComponentLink2Description=Datasheet, ComponentLink2URL=http://katalog.we-online.com/led/datasheet/150080SS75000.pdf, PackageReference=0805_A, PartNumber=150080SS75000
LED2: library part CMP-1426-00008-1, "SMD mono-color Chip LED, WL-SMCW, Blue", Color=Blue, Manufacturer="Wuerth Elektronik", ComponentLink1Description="Manufacturer URL", ComponentLink1URL=http://www.we-online.com, ComponentLink2Description=Datasheet, ComponentLink2URL=http://katalog.we-online.com/led/datasheet/150080BS75000.pdf, PackageReference=0805_A, PartNumber=150080BS75000
P1: library part CMP-1502-00949-1, "THT Vertical Pin Header WR-PHD, Pitch 1.27 mm, Dual Row, 14 pins", Contact Resistance=20mOhm, Manufacturer="Wurth Elektronik", Operating Temperature=-40to105degC, Rated current=1A, Withstanding Voltage=500VAC, Working Voltage=100VAC, Datasheet URL=https://katalog.we-online.de/em/datasheet/62201421121.pdf, Gender=Male, Manufacturer URL=http://www.we-online.de, Mounting Technology=THT, Orientation=Vertical, Package Reference=62201421121, Packaging=Box, Part Number=62201421121, Pin Number=14, Pitch=1.27mm, Publisher=WurthElektronik, Row Number=Dual
P2 P3: library part CMP-2000-07492-1, "Male Header, Pitch 2.54 mm, 1 x 2 Position, Height 8.21 mm, Tail Length 3.05 mm, -65 to 105 degC, RoHS, Bulk", Case\/Package=100, Colour=Black, Current Rating=3A, Flammability Rating=UL94V-0, High Temperature Housing=Yes, Manufacturer="TE Connectivity", Max Current Rating=5A, Max Operating Temperature=105degC, Min Operating Temperature=-65degC, Package Description="Male Header, Pitch 2.54 mm, 1 x 2 Position, Height 8.21 mm, Tail Length 3.05 mm", Package Quantity=500, Approvals=CSA, Board Standoff=No(Without), Connector Type=Header, Contact Gender=Male, Contact Material=CopperAlloy, Contact Mating Length=0.23inch, Contact Plating=Matte, Contact Protection=No(Without), Contact Shape=Square, Datasheet URL=http://www.te.com/commerce/DocumentDelivery/DDEController?Action=showdoc&DocId=Customer+Drawing%7F146280%7FH1%7Fpdf%7FEnglish%7FENG_CD_146280_H1.pdf%7F5-146280-2, Datasheet Version="Rev. H1, 08/2016", Depth=2.34mm, Gasket=No(Without), High Speed Serial Data Connector=No, Housing Colour=Black, Housing Material=Polymer, Keyed=No, Length=4.67mm, Manufacturer URL=http://www.te.com/, Mating Alignment=No(Without), Mating Connector Lock=No(Without), Mating Post Length=0.23inch, Mount=ThroughHole, Mounting Technology=ThroughHole, Number of Contacts=2, Number of Positions=2, Number of Rows=1, Orientation=Straight, Package Reference=5-146280-2, Packaging=Carton, Panel Mount Retention=No(Without), PCB Mount Retention=Without, PCB Mounting Orientation=Vertical, PCB Thickness=0.063inch, Pitch=2.54mm, Radiation Hardening=No, RoHSCompliant=true, Row Spacing=2.54mm, Selectively Loaded=No(Without), Stabilizers=No(Without), Termination=ThroughHole, Termination Post Length=0.12inch
R1 R2 R3 R4 R5 R6 R7 R8 R11 R12 R13 R17 R22 R23: library part RMCF0603FT4K70, "Res Thick Film 0603 4.7K Ohm 1% 1/10W 100ppm/C Molded SMD SMD Paper T/R", Case Code (Imperial)=0603, Case Code (Metric)=1608, Manufacturer="Stackpole Electronics", Max Operating Temperature=155°C, Max Power Dissipation=100mW, Min Operating Temperature=-55°C, Resistance=4.7kR, Resistor Type="Thick Film", Supplier Part Number 1=RMCF0603FT4K70CT-ND, Temperature Coefficient=100ppm/°C, Tolerance=1%, Case/Package=0603, Category="Chip SMD Resistors", ComponentLink1Description=https://datasheet.ciiva.com/26835/getdatasheetpartid-486078-26835642.pdf?src-supplier=Verical, ComponentLink1URL=https://datasheet.ciiva.com/26835/getdatasheetpartid-486078-26835642.pdf?src-supplier=Verical, Contact Plating=Tin,Matte, Depth=0.8mm, Features="Automotive AEC-Q200", Height=0.022inch, Lead Free="Lead Free", Length=1.55mm, Manufacturer Part Number=RMCF0603FT4K70, Military Standard=Not, Mount="Surface Mount", Number of Terminations=2, Packaging="Tape and Reel", Power Rating=100mW, Pricing 1="1=0.10000, 10=0.01500, 100=0.00590, 1000=0.00265, 2500=0.00230 (USD)", Radiation Hardening=No, RoHS=Yes, Stock 1=1530231, Supplier 1=Digi-Key, Width=0.031inch
R9 R10: library part CMP-1659-00038-1, "Chip Resistor, 560 Ohm, +/- 1%, 0.1 W, -55 to 155 degC, 0603 (1608 Metric), RoHS, Tape and Reel", Case Code (Imperial)=0603, Case Code (Metric)=1608, Max Operating Temperature="155 degC", Min Operating Temperature="-55 degC", Power Rating="100 mW", Resistance=560R, Tolerance=1%, Voltage Rating="50 V", Case\Package=0603, ComponentLink1Description="Manufacturer URL", ComponentLink1URL=http://www.yageo.com/, ComponentLink2Description=Datasheet, ComponentLink2URL=http://www.yageo.com/documents/recent/PYu-RC_Group_51_RoHS_L_04.pdf, DatasheetVersion="Rev. 4, 02/2016", Height="0.45 mm", Length="1.6 mm", Mount="Surface Mount", PackageDescription="2-Pin Surface Mount Device, Body 1.6 x 0.8 mm", PackageReference=0603, Packaging="Tape and Reel", Pins=2, REACH SVHC="No SVHC", RoHSCompliant=true, Voltage Rating (DC)="50 V", Width="0.8 mm"
R14 R15: library part CMP-2000-03099-1, Manufacturer="Vishay Dale", Part Number=CRCW060322R0JNTA
R16: library part CMP-2000-02996-1, Manufacturer="Vishay Dale", Part Number=CRCW06031K50FKTA, Res=1K5
SW1: "SWITCH TOGGLE DIP SPDT 150MA 30V / WIRED: / 1  2  3 / 4  5  6", Contact Current Rating=150mA, Manufacturer=Grayhill, Max Operating Temperature=85°C, Max Voltage Rating (DC)=30V, Min Operating Temperature=-40°C, Package Quantity=13, Supplier Part Number 1=GH7721-ND, Actuator Length=5.08mm, Actuator Type=Toggle, Body Material=Thermoplastic, Category="DIP Switches", ComponentLink1Description=https://datasheet.ciiva.com/16198/dip-series-76-and-78-spdt-16198550.pdf?src-supplier=Onlinecomponents.com, ComponentLink1URL=https://datasheet.ciiva.com/16198/dip-series-76-and-78-spdt-16198550.pdf?src-supplier=Onlinecomponents.com, ComponentLink2Description=https://datasheet.ciiva.com/2865/dip-series-76-and-78-spdt-2865964.pdf?src-supplier=Digi-Key, ComponentLink2URL=https://datasheet.ciiva.com/2865/dip-series-76-and-78-spdt-2865964.pdf?src-supplier=Digi-Key, Contact Material="Copper Alloy,Gold", Contact Plating=Gold, Current Rating=150mA, Depth=9.65mm, Electrical Life=2000Cycles, Lead Free="Lead Free", Length=0.78inch, Manufacturer Part Number=76STC02T, Max Current Rating=150mA, Mechanical Life=2000Cycles, Mount="Through Hole,PCB", Number of Circuits=4, Number of Positions=4, Orientation=Straight, Packaging=Rail/Tube, Pitch=0.1inch, Pricing 1="1=4.74000, 10=4.54200, 25=4.14720, 100=3.59410, 250=3.25836, 500=3.02140, 1000=2.80417, 2500=2.54745, 5000=2.36972 (USD)", Radiation Hardening=No, REACH SVHC="No SVHC", RoHS=Yes, Stock 1=149, Supplier 1=Digi-Key, Termination="PC Pins", Throw Configuration=SPDT, Voltage Rating=30V, Voltage Rating (DC)=30V, Washable=No
SW2: library part CMP-1677-00001-4, "Sealed Tactile Switch, SPST-NO, 3 to 24 V, -25 to 70 degC, 4-Pin SMD, RoHS, Bulk", Current Rating="50 mA", Manufacturer=Omron, Max Operating Temperature="70 degC", Min Operating Temperature="-25 degC", Package Quantity=1500, Voltage Rating="24 V", ComponentLink1Description="Manufacturer URL", ComponentLink1URL=http://www.omron.com/, ComponentLink2Description=Datasheet, ComponentLink2URL=http://www.omron.com/ecb/products/pdf/en-b3s.pdf, Contact Plating=Silver, DatasheetVersion=10/2014, Height="4.3 mm", Length="6.6 mm", Mount="Surface Mount", Mounting Technology="Surface Mount", PackageDescription="4-Pin Surface Mount Device, Body 6.6 x 6 mm", PackageReference=B3S-1000, Packaging=Bulk, REACH SVHC="No SVHC", RoHSCompliant=true
U1: library part CMP-1685-00014-1, "Fixed Positive Voltage Regulator, 7 to 25 V, 1.5 A, 0 to 125 degC, 3-Pin DDPAK (KTT), Green (RoHS / & no Sb/Br), Tape and Reel", Case Code (Imperial)=0603, Case Code (Metric)=1608, Max Operating Temperature="155 degC", Min Operating Temperature="-55 degC", Package Quantity=5000, Power Rating="100 mW", Resistance="220 Ohm", Tolerance=1%, Voltage Rating="50 V", Case\Package=0603, Code_JEDEC=TO-263, ComponentLink1Description="Manufacturer URL", ComponentLink1URL=http://www.ti.com/, ComponentLink2Description=Datasheet, ComponentLink2URL=http://www.ti.com/lit/ds/symlink/ua7805.pdf, DatasheetVersion="SLVS056P, 01/2015", Height="0.45 mm", Length="1.6 mm", Mount="Surface Mount", PackageDescription="3-Pin Surface Mount Device, Body 10.16 x 9.015 mm, Pitch 2.54 mm", PackageReference=KTT0003A, Packaging="Tape and Reel", Pins=2, REACH SVHC="No SVHC", RoHSCompliant=true, Voltage Rating (DC)="50 V", Width="0.8 mm"
U2: "8 SOIC 3.90mm(.150in) TUBECAN Flexible Data Rate Transceiver", Manufacturer=Microchip, Supplier Part Number 1=MCP2562FD-E/SN-ND, Category="Interface ICs", ComponentLink1Description=https://datasheet.ciiva.com/46406/1821190-46406053.pdf?src-supplier=Element14, ComponentLink1URL=https://datasheet.ciiva.com/46406/1821190-46406053.pdf?src-supplier=Element14, ComponentLink2Description=https://datasheet.ciiva.com/48512/mcp2562fd-e-mf-eng-tds-48512074.pdf?src-supplier=Distrelec, ComponentLink2URL=https://datasheet.ciiva.com/48512/mcp2562fd-e-mf-eng-tds-48512074.pdf?src-supplier=Distrelec, ComponentLink3Description=https://datasheet.ciiva.com/48473/20005284a-48473180.pdf?src-supplier=Avnet, ComponentLink3URL=https://datasheet.ciiva.com/48473/20005284a-48473180.pdf?src-supplier=Avnet, ComponentLink4Description=https://datasheet.ciiva.com/46406/1821190-46406061.pdf?src-supplier=Element14, ComponentLink4URL=https://datasheet.ciiva.com/46406/1821190-46406061.pdf?src-supplier=Element14, Manufacturer Part Number=MCP2562FD-E/SN, Pricing 1="1=0.96000, 25=0.80000, 100=0.73000 (USD)", RoHS=Yes, Stock 1=1433, Supplier 1=Digi-Key
U3: library part CMP-2000-07604-2, "IC REG LINEAR 3.3V 300MA SOT23-5", Case/Package=SOT-23-5, Dropout Voltage=380mV, Max Input Voltage=5.5V, Max Operating Temperature=125°C, Max Output Current=300mA, Min Input Voltage=2.5V, Min Operating Temperature=-40°C, Nominal Output Voltage=3.3V, Operating Supply Current=42uA, Power Supply Rejection Ratio (PSRR)=60dB, Quiescent Current=38uA, Accuracy=3%, Height=1.1mm, Length=2.9mm, Mount="Surface Mount", Number of Outputs=1, Number of Pins=5, Output Current=300mA, Output Type=Fixed, Output Voltage=3.3V, Packaging="Tape and Reel", REACH SVHC="No SVHC", Width=1.6mm
U4: library part CMP-1305-00036-1, "Single Supply Quad Comparators, 0 to 70 degC, 14-Pin SOIC, Pb-Free, Tape and Reel", Manufacturer="On Semiconductor", ComponentLink1Description="Manufacturer URL", ComponentLink1URL=http://www.onsemi.com/, ComponentLink2Description=Datasheet, ComponentLink2URL=http://www.onsemi.com/pub_link/Collateral/LM339-D.PDF, ComponentLink3Description="Package Specification", ComponentLink3URL=http://www.onsemi.com/pub_link/Collateral/751A-03.PDF, DatasheetVersion="Rev. 20", IO Typ (mA)=16, Mounting Technology="Surface Mount", PackageDescription="14-Pin Small Outline Integrated Circuit, Body 8.65 x 3.9 mm, Pitch 1.27 mm", PackageReference=SOIC-14-751A-03, PackageVersion="Rev. K, 05/2011", Packing="Tape and Reel", PartNumber=LM339DR2G, RoHS=TRUE
U6: library part CMP-0237-00046-3, "ARM Cortex-M3 32-bit MCU, 32 KB Flash, 10 KB Internal RAM, 37 I/Os, 48-pin UFQFPN, -40 to 85 degC, Tray", I/Os (High Current)=37, Operating Frequency(F) (Processor speed) (MHz)=72, Supply Voltage(Vcc) min (V)=2, A/D Converter="2x12-bit (10 Channel)", ComponentLink1Description="Manufacturer URL", ComponentLink1URL=http://www.st.com/web/en/home.html, ComponentLink2Description=Datasheet, ComponentLink2URL=http://www.st.com/st-web-ui/static/active/en/resource/technical/document/datasheet/CD00210843.pdf, ComponentLink3Description="Package Specification", ComponentLink3URL=http://www.st.com/st-web-ui/static/active/en/resource/technical/document/data_brief/DM00071938.pdf, Core="ARM Cortex-M3", DatasheetVersion="Rev. 6", FLASH Size (Prog) (kB)=32, Internal RAM Size (kB)=10, Mounting Technology="Surface Mount", PackageDescription="48-Pin Ultra Thin Fine Pitch Quad Flat No-Lead, 7 x 7 x 0.6 mm Body, 0.5 mm Pitch, Exposed Pad", PackageReference=UFQFPN48, PackageVersion="Rev. 1, 04/2013", Packing=Tray, PartNumber=STM32F103C6U6A
X1: library part CMP-2000-05034-1, "Microprocessor Crystal, 8 MHz, 18 PF, -40 to 85 degC, 2-Pin SMD, RoHS, Tape and Reel", ESR (Equivalent Series Resistance)=100Ohm, Frequency=8MHz, Frequency Stability=±30ppm, Frequency Tolerance=±20ppm, Load Capacitance=18pF, Manufacturer=Abracon, Operating Mode=Fundamental, Operating Temperature=-40degC~85degC, Package / Case=2-SMD, Package Description="2-Pin Surface Mount Device, Body 6 x 3.5 mm", Package Reference=ABM7, Standard Package=1,000, 3D Model="ABM7.pdf /  / ABM7.stp", Catalog Drawings="ABM7SeriesTop /  / ABM7SeriesSide /  / ABM7SeriesBottom", Category=CrystalsandOscillators, Datasheet URL=https://datasheet.ciiva.com/1357/1718755-1357277.pdf, Datasheet Version=Dec-17, Family=Crystals, Featured Product=ABM7andABM11Crystals, Height="0.055\"(1.40mm)", Manufacturer URL=http://www.abracon.com/, Mounting Type=SurfaceMount, Online Catalog=ABM7Series, Other Names="535-9831-2 / ABM7-8.000MHZ-D-2-Y-T / ABM78000MHZD2YT", Packaging=Tape&Reel(TR), RoHS Information=RoHS2/REACHCompliance, Series=ABM7, Size / Dimension="0.236\"Lx0.138\"W(6.00mmx3.50mm)", Type=MHzCrystal

## Via types
v1: diameter 0.45, hole 0.2, Top Layer to Bottom Layer, tented both sides, 38 vias
v2: diameter 0.6, hole 0.305, Top Layer to Bottom Layer, tented both sides, 31 vias
v3: diameter 0.5, hole 0.2, Top Layer to Bottom Layer, 25 vias
v4: diameter 1, hole 0.5, Top Layer to Bottom Layer, tented both sides, 14 vias
v5: diameter 0.45, hole 0.2, Top Layer to Bottom Layer, 2 vias

## Nets (pads, with @x,y where several pads share a name; then routed paths per layer and width w, separated by ;. In a path a pad name is that pad's centre, name@x,y a point inside that pad or via, vN(x,y) a via of type N, cw(c..) or ccw(c..) an arc to the next point about the centre after c; other vN are vias at no path point)
3V3_VREF: C14.1 R3.1 R6.2 U4.8 U4.10 | length 16.6
  Bottom Layer w0.254: C14.1 56.408,84.992 56.434,84.966 57.186,84.214 57.186,82.588 57.859,81.915 62.65,81.915 ; U4.10 63.246,82.511 62.65,81.915 ; U4.8 65.786,82.064 65.637,81.915 62.65,81.915
  Bottom Layer w0.381: R3.1@53.514,84.966 55.089,84.966 C14.1@56.434,84.966
12V_VREF: C13.1 R22.1 R23.2 U4.4 U4.6 | length 14.5
  Bottom Layer w0.254: R22.1@53.668,86.416 53.674,86.423 55.02,86.423 55.096,86.498 56.268,86.498 C13.1@56.336,86.567 ; C13.1@56.336,86.492 56.411,86.492 C13.1@56.486,86.416 ; C13.1 56.411,86.58 57.277,87.445 57.277,88.497 57.807,89.027 61.827,89.027 ; U4.4 61.976,88.878 61.827,89.027 ; U4.6@64.516,87.831 U4.6 64.516,88.431 63.92,89.027 61.827,89.027
+3V3: C7.1 C8.1 C10.1 C11.1 C12.1 C15.1 C16.1 P1.3 P2.1 P3.1 R3.2 R4.2 R7.2 R12.2 R16.2 U2.5 U3.5 U6.1 U6.9 U6.24 U6.36 U6.48 | length 40
  Bottom Layer w0.254: C8.1 C8.1@66.446,75.498 ; v2(66.446,74.549) C8.1@66.446,75.498 ; U2.5 67.716,74.422 66.761,75.377 66.567,75.377 C8.1@66.446,75.498 ; R7.2@68.841,87.992 70.173,87.992 v1(70.18,87.986) ; v2(74.422,85.141) 74.437,85.126 74.437,84.714 C12.1@74.944,84.207 ; C12.1 74.854,83.744 75.003,83.595 75.398,83.595 75.532,83.461 75.532,83.271 75.681,83.122 75.888,83.122 ; U6.1@76.831,79.122 77.352,79.122 77.354,79.12 77.354,78.399 77.581,78.172 78.104,78.172 78.106,78.17 78.106,76.945 77.557,76.396 77.499,76.396 77.251,76.148 C7.1@77.251,74.575 ; v2(76.985,73.642) 76.985,74.03 C7.1@77.251,74.296 ; U6.24 83.606,85.631 83.608,85.633 C15.1@85.09,85.633 ; v2(84.836,76.302) 84.854,76.319 84.854,77.579 C11.1 84.871,79.12 84.873,79.122 U6.36@84.881,79.122 ; C15.1 85.425,85.501 86.284,85.501 v2(86.339,85.446) ; R12.2 95.121,88.126 95.962,88.967 98.929,88.967 99.593,88.303 99.593,83.541 99.619,83.515 99.619,82.038 99.47,81.89 P1.3
  Bottom Layer w0.508: R3.2 53.686,83.623 53.686,82.585 v2(53.703,82.568) ; U3.5 57.795,79.735 57.795,79.905 58.154,80.264 58.196,80.264 58.529,80.597 C16.1@58.529,81.153 ; C16.1 v2(59.595,81.153) ; R4.2 R7.2 R7.2@68.841,87.992 ; v1(96.901,78.74) 97.028,78.613 R16.2
+5V0: C2.1 C9.1 D2.1 U1.3 U2.3 | length 26.4
  Bottom Layer w0.381: U1.3@59.055,70.485 58.974,70.566 58.974,73.198 58.893,73.279 58.893,73.354 59.207,73.668 60.022,73.668 60.706,74.353 D2.1 60.706,75.242 61.39,75.926 61.829,75.926 63.282,77.379 64.584,77.379 64.87,77.666 64.87,78.898 65.343,79.37 69.452,79.37 70.868,77.955 72.496,76.327 74.992,76.327 75.338,75.981 75.049,75.692 U2.3
+12V0: C1.1 C4.1 F1.2 R1.2 R2.2 R5.2 R8.2 R22.2 U1.1 U4.3 | length 88.3
  Top Layer w0.381: v2(51.978,88.011) 59.563,88.011 v1(60.706,86.868) ; v2@53.873,68.123 53.873,66.904 60.812,59.965 v2(62.941,59.965)
  Bottom Layer w0.25: v2(62.941,59.965) 62.941,59.906 62.84,59.804 62.84,56.826 63.063,56.603 R1.2 ; R1.2@64.008,56.603 R8.2 66.141,56.603 67.64,58.102 67.64,61.728 68.413,62.5 84.409,62.5 85.192,61.717 85.192,56.992 85.415,56.769 87.02,56.769 R5.2@88.398,56.769
  Bottom Layer w0.381: F1.2 53.011,73.406 F1.2@53.455,73.406 ; R22.2@53.668,87.916 53.573,88.011 v2(51.978,88.011) 51.308,87.341 51.308,83.312 54.714,79.906 54.714,78.136 55.106,77.744 55.106,75.698 C4.1 55.493,73.567 55.28,73.354 55.28,73.279 53.455,73.279 53.975,72.759 U1.1@53.975,70.485 ; v2(53.873,68.199) 53.915,68.241 53.915,70.502 U1.1@53.975,70.561 ; v1(60.706,86.868) U4.3
+B_BACKUP: J1.10 J2.10 | length 29.7
  Top Layer w0.381: J2.10@92.958,85.606 93.041,85.523 93.291,85.523 94.463,84.351 94.463,65.601 93.777,64.916 v1(93.777,64.897)
  Bottom Layer w0.381: J1.10@86.373,66.005 90.002,66.005 90.059,65.948 90.123,65.948 90.704,65.367 90.704,65.303 91.11,64.897 v1(93.777,64.897)
ACC_CAN_H: J1.7 J2.7 | length 22.6
  Top Layer w0.254: J1.7 J1.7@79.373,66.47
  Bottom Layer w0.208: J1.7@79.77,66.009 79.77,66.587 81.331,68.148 81.331,70.485 83.058,72.212 86.639,72.212 87.046,72.619 87.605,73.177 87.605,74.168 88.121,74.685 90.083,74.685 90.829,75.431 90.829,78.005 91.412,78.587 91.831,79.006 J2.7@92.358,79.006
ACC_CAN_L: J1.18 J2.18 | length 20
  Top Layer w0.228: J2.18 89.621,80.356 90.604,79.373 v1(90.604,78.775)
  Bottom Layer w0.208: J1.18 80.073,69.665 81.021,70.613 82.93,72.522 86.511,72.522 86.918,72.928 87.295,73.306 87.295,74.296 87.993,74.994 89.955,74.994 90.52,75.559 90.52,78.532 90.558,78.57 90.558,78.728 v1(90.604,78.775)
B_CAN_6: J1.6 J2.6 | length 22.6
  Top Layer w0.228: v5(89.814,77.064) 92.35,77.064 J2.6
  Bottom Layer w0.228: J1.6 77.173,65.888 77.84,66.555 79.019,67.734 79.019,70.129 79.477,70.587 82.042,73.152 85.683,73.152 86.385,73.854 86.385,74.803 86.995,75.413 86.995,76.403 87.554,76.962 89.653,76.962 89.754,77.064 v5(89.814,77.064)
B_CAN_17: J1.17 J2.17 | length 16.1
  Bottom Layer w0.228: J1.17 77.873,69.388 77.873,69.449 79.34,70.916 ; 79.34,70.916 81.905,73.482 85.547,73.482 86.055,73.99 86.055,74.94 86.665,75.55 86.665,76.54 87.417,77.292 87.838,77.292 88.034,77.488 88.034,77.615 88.575,78.156 J2.17
BLUE_LED: R10.1 U6.3 | length 9.2
  Bottom Layer w0.203: R10.1 68.72,81.459 70.602,79.578 75.134,79.578 75.678,80.122 U6.3@76.831,80.122
BOOT0: P2.2 R11.2 U6.44 | length 3.8
  Bottom Layer w0.254: 80.106,76.904 80.106,76.545 80.255,76.396 80.891,76.396 81.089,76.198 81.165,76.198 81.165,75.426 82.042,74.549 P2.2
BOOT1: P3.2 R17.2 U6.20 | length 18.7
  Top Layer w0.152: v5(81.94,87.3) 81.961,87.32 87.914,87.32 88.367,86.868 91.11,86.868 91.883,87.641 92.62,87.641 P3.2
  Bottom Layer w0.152: U6.20 81.615,85.381 81.615,87.028 81.886,87.3 v5(81.94,87.3) ; R17.2 89.889,86.499 90.295,86.905 91.934,86.905 P3.2@92.812,87.782
CAN1_RX: U2.4 U6.45 | length 11.9
  Bottom Layer w0.254: U2.4 74.722,74.422 75.844,73.3 75.844,73.233 76.688,72.39 78.782,72.39 79.629,73.237 79.629,76.759 79.606,76.782 U6.45@79.606,77.847
CAN1_TX: U2.1 U6.46 | length 15.8
  Bottom Layer w0.254: U2.1 73.631,78.271 74.697,78.271 75.038,78.613 75.924,78.613 76.2,78.337 76.2,73.381 76.835,72.746 78.635,72.746 79.109,73.219 79.109,75.612 79.106,75.614 U6.46@79.106,77.847
EPS_TO_LKAS_RX: J1.12 SW1.C2 | length 37.9
  Bottom Layer w0.2: J1.12 66.873,66.818 67.183,66.508 67.183,64.243 67.392,64.033 90.049,64.033 90.241,64.226 92.314,64.226 92.912,63.629 95.807,63.629 SW1.C2@98.578,60.858
EPS_TO_LKAS_TX: J2.12 R2.1 SW1.2B U4.5 | length 76.8
  Top Layer w0.254: v1(63.874,88.058) 63.348,87.532 63.348,70.196 63.119,69.967 63.119,64.951 66.167,61.903 66.167,60.046 66.04,59.919 v2(66.04,59.408) ; v1(87.02,60.173) 87.02,60.782 87.376,61.138 87.376,65.674 88.175,66.473 88.175,66.509 88.822,67.156 J2.12
  Bottom Layer w0.2: v2(66.04,59.408) 66.106,59.474 66.106,60.656 68.277,62.827 84.544,62.827 86.972,60.398 86.972,60.221 v1(87.02,60.173) R2.1
  Bottom Layer w0.254: U4.5 63.319,88.058 v1(63.874,88.058) ; J2.12 88.98,67.034 95.046,67.034 98.849,63.231 SW1.2B@98.849,62.963
EPS_TO_LKAS_TX1: R1.1 SW1.2A U4.14 | length 58.9
  Top Layer w0.254: v1(58.445,83.913) 58.445,65.252 63.721,59.976 63.721,59.621 v2@63.779,59.563
  Bottom Layer w0.2: R1.1 63.763,58.214 v2(63.763,59.563) 64.446,59.563 65.48,60.597 65.48,60.882 68.028,63.43 86.887,63.43 87.706,62.611 90.059,62.611 90.695,63.248 SW1.2A
  Bottom Layer w0.254: U4.14 58.166,83.673 58.405,83.913 v1(58.445,83.913)
F_CAN_H: J1.2 J2.2 U2.7 | length 42.4
  Top Layer w0.254: J1.2 68.65,65.882 68.65,66.577 70.056,67.984 70.056,70.076 71.228,71.247 85.293,71.247 88.344,68.196 92.203,68.196 92.203,68.256 J2.2
  Bottom Layer w0.203: U2.7 68.217,76.987 69.367,76.987 70.18,76.175 70.18,68.012 68.773,66.605 J1.2@68.773,66.005
F_CAN_L: J1.13 J2.13 U2.6 | length 29.1
  Top Layer w0.254: J1.13 69.073,69.606 71.069,71.603 85.573,71.603 87.655,69.52 88.444,69.52 J2.13@88.858,69.106
  Bottom Layer w0.254: U2.6 68.666,75.692 69.473,74.885 J1.13@69.473,69.505
GND: C1.2 C2.2 C3.2 C4.2 C5.2 C6.2 C7.2 C8.2 C9.2 C10.2 C11.2 C12.2 C13.2 C14.2 C15.2 C16.2 J1.14 J2.14 J3.5 LED1.1 LED2.1 P1.5 P1.7 P1.11 R6.1 R11.1 R13.2 R17.1 R23.1 SW2.4 U1.2 U1.4 U2.2 U2.8 U3.2 U4.12 U6.8 U6.23 U6.35 U6.47 U6.49 | length 69.8
  Top Layer w0.254: v1(95.013,75.841) 95.013,75.363 95.086,75.29 J3.5
  Top Layer w0.305: LED1.1 LED2.1 54.838,58.31 56.034,59.506 56.534,59.506 v4(56.667,59.639) ; v4(56.058,62.281) 56.191,62.148 56.191,61.923 57.012,61.102 SW2.4
  Bottom Layer w0.152: v4(56.058,62.281) 56.058,61.951 56.35,61.658 U1.4@56.655,61.658 ; v4(60.401,61.671) 62.522,63.792 62.522,64.059 ; 61.785,67.373 62.065,67.373 62.179,67.488 62.179,70.985 v4(62.363,71.169)
  Bottom Layer w0.254: R6.1 55.164,83.717 56.258,83.717 C14.2 ; R23.1 55.17,87.848 56.255,87.848 C13.2@56.261,87.842 ; C3.2 56.125,81.179 56.401,81.455 56.673,81.455 ; v2(56.261,88.646) C13.2@56.261,87.842 ; C14.2@56.333,83.766 56.333,82.605 v2@56.682,82.256 ; C13.2@56.336,87.767 C13.2@56.261,87.842 ; v2(66.421,78.105) 66.421,76.927 C8.2 66.394,76.825 67.543,77.974 67.543,78.059 67.716,78.232 U2.8 ; v2(66.624,83.058) 68.033,83.058 C5.2 ; v2(66.802,84.938) 68.033,84.938 C6.2 ; U2.2 73.701,77.071 75.303,77.071 75.438,77.206 v2(75.438,78.059) ; v2(73.787,83.515) 74.356,82.946 C12.2@74.733,82.946 ; C12.2@74.886,82.946 75.21,82.622 U6.8@76.831,82.622 ; C10.2@78.451,76.073 78.606,76.228 78.606,76.904 ; C7.2 78.486,74.261 v2(78.486,73.431) ; C7.2@78.477,74.549 C10.2@78.477,76.073 ; R11.1 82.81,75.852 v2(83.624,75.852) ; U6.23 83.106,87.126 83.255,87.274 84.777,87.274 85.046,87.005 85.046,86.877 C15.2@85.09,86.833 ; U6.35 86.138,79.622 86.351,79.409 86.351,78.069 86.319,78.036 86.319,77.845 86.05,77.576 86.05,76.458 85.869,76.277 v2(85.87,75.65) ; C15.2 85.4,86.787 86.309,86.787 v2(86.339,86.817)
  Bottom Layer w0.305: v1(60.198,84.658) 60.706,84.15 U4.12 ; v1(87.122,88.29) 87.413,87.999 R17.1
  Bottom Layer w0.381: 56.673,81.455 v2@56.673,82.129
  Bottom Layer w0.762: C1.2@56.48,73.279 56.486,73.273 56.486,71.714 U1.2@56.515,71.685 ; U1.2@56.515,71.761 v2(56.515,68.148) 56.515,66.497 56.642,66.37 ; U1.2@56.515,72.009 56.566,72.06 v2(57.683,72.06) 57.693,72.069 57.693,73.279 57.699,73.285 57.699,73.593 58.045,73.938 C4.2 58.045,75.587 57.555,76.076 57.189,76.076 56.906,76.359 56.906,76.854 56.769,76.991 U3.2 ; 56.585,81.201 57.264,81.201 57.286,81.179 C16.2 ; v1(96.469,66.929) 96.864,66.535 R13.2
  other v2: 56.633,82.169
  other v3: 78.656,79.672 79.756,79.672 80.856,79.672 81.956,79.672 83.056,79.672 78.656,80.772 79.756,80.772 80.856,80.772 81.956,80.772 83.056,80.772 78.656,81.872 79.756,81.872 80.856,81.872 81.956,81.872 83.056,81.872 78.656,82.972 79.756,82.972 80.856,82.972 81.956,82.972 83.056,82.972 78.656,84.072 79.756,84.072 80.856,84.072 81.956,84.072 83.056,84.072
  other v4: 61.417,58.369 54.381,62.357 64.033,62.89 53.442,63.271 59.157,63.475 56.82,65.786 64.059,66.091 60.477,66.192 61.316,68.656 61.087,70.866
IGN1: F1.1 J1.19 J2.19 | length 86.9
  Top Layer w0.508: J1.19@82.444,69.276 82.444,68.093 82.677,67.86 82.677,63.684
  Top Layer w0.635: v1(87.151,70.923) 87.376,71.148 87.376,75.133 86.614,75.895 86.614,80.662 88.258,82.306 J2.19@88.858,82.306
  Top Layer w0.762: v2@51.943,80.899 51.943,57.49 52.867,56.566 54.876,56.566 56.045,57.734 59.36,57.734 59.817,57.277 62.941,57.277 63.729,58.064 66.051,58.064 66.848,58.862 66.848,61.779 68.087,63.017 82.01,63.017 82.677,63.684
  Bottom Layer w0.635: J1.19 82.273,69.751 83.445,70.923 v1(87.151,70.923)
  Bottom Layer w0.762: v2(51.943,81.026) 52.832,80.137 F1.1
LDW_OFF_IND: J1.11 J2.11 | length 52.6
  Top Layer w0.254: J1.11 64.673,68.824 65.203,68.295 65.484,68.295 66.443,67.335 67.056,67.335 67.234,67.158 67.234,64.831 68.336,63.729 79.832,63.729 80.518,64.414 80.518,66.853 81.204,67.539 81.204,70.231 81.813,70.841 84.887,70.841 87.274,68.453 87.274,66.075 87.02,65.821 87.02,62.027 86.411,61.417 86.411,58.89 87.02,58.281 88.609,58.281 89.052,58.725 89.052,64.762 J2.11
LDW_OFF_SW: J1.8 J2.8 | length 29.3
  Top Layer w0.2: v1(90.729,67.513) 90.76,67.513 91.116,67.158 93.421,67.158 93.955,67.691 93.955,80.583 93.082,81.456 J2.8
  Bottom Layer w0.2: 89.789,68.25 90.195,68.25 90.398,68.047 90.398,67.912 90.729,67.581 v1(90.729,67.513)